# Altium PCB pcb.PcbDoc
Units mm, origin at the board's own origin, x right, y up, seen from the top; angles counter-clockwise.
Board outline 30 x 50 mm, 4 copper layers (Top Layer, GND, VCC, Bottom Layer), stack 0.651 mm thick; 32 components, 44 nets, 144 pads, 18 vias.
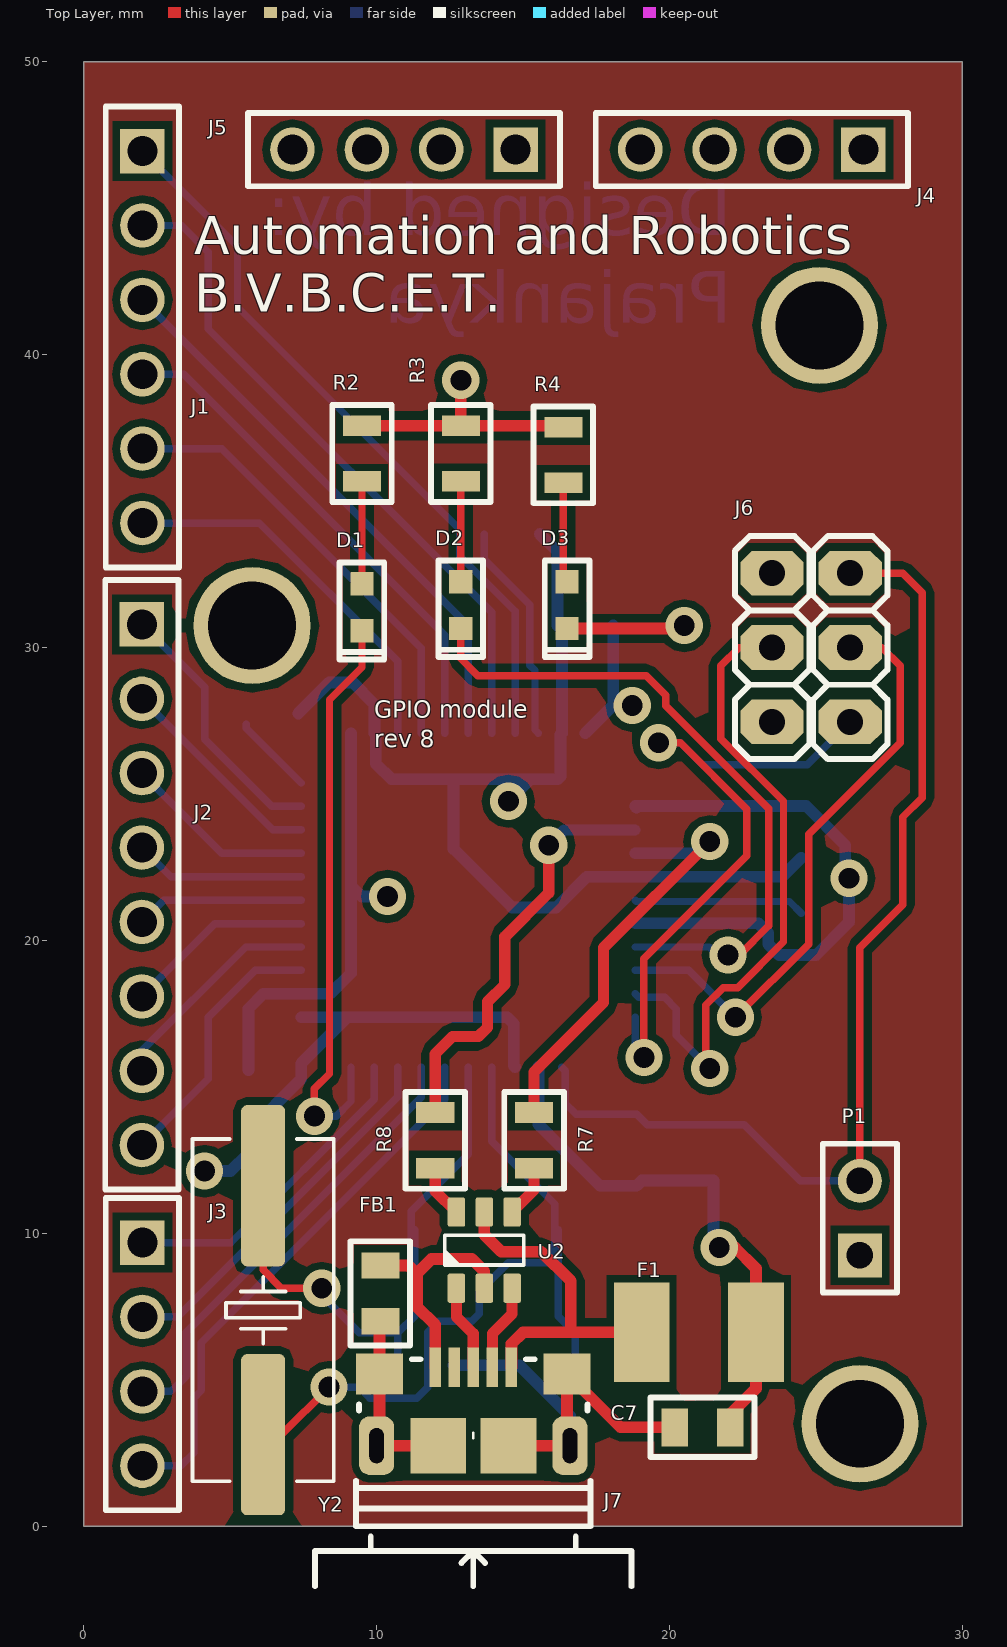
[diagram p0: Top Layer view]
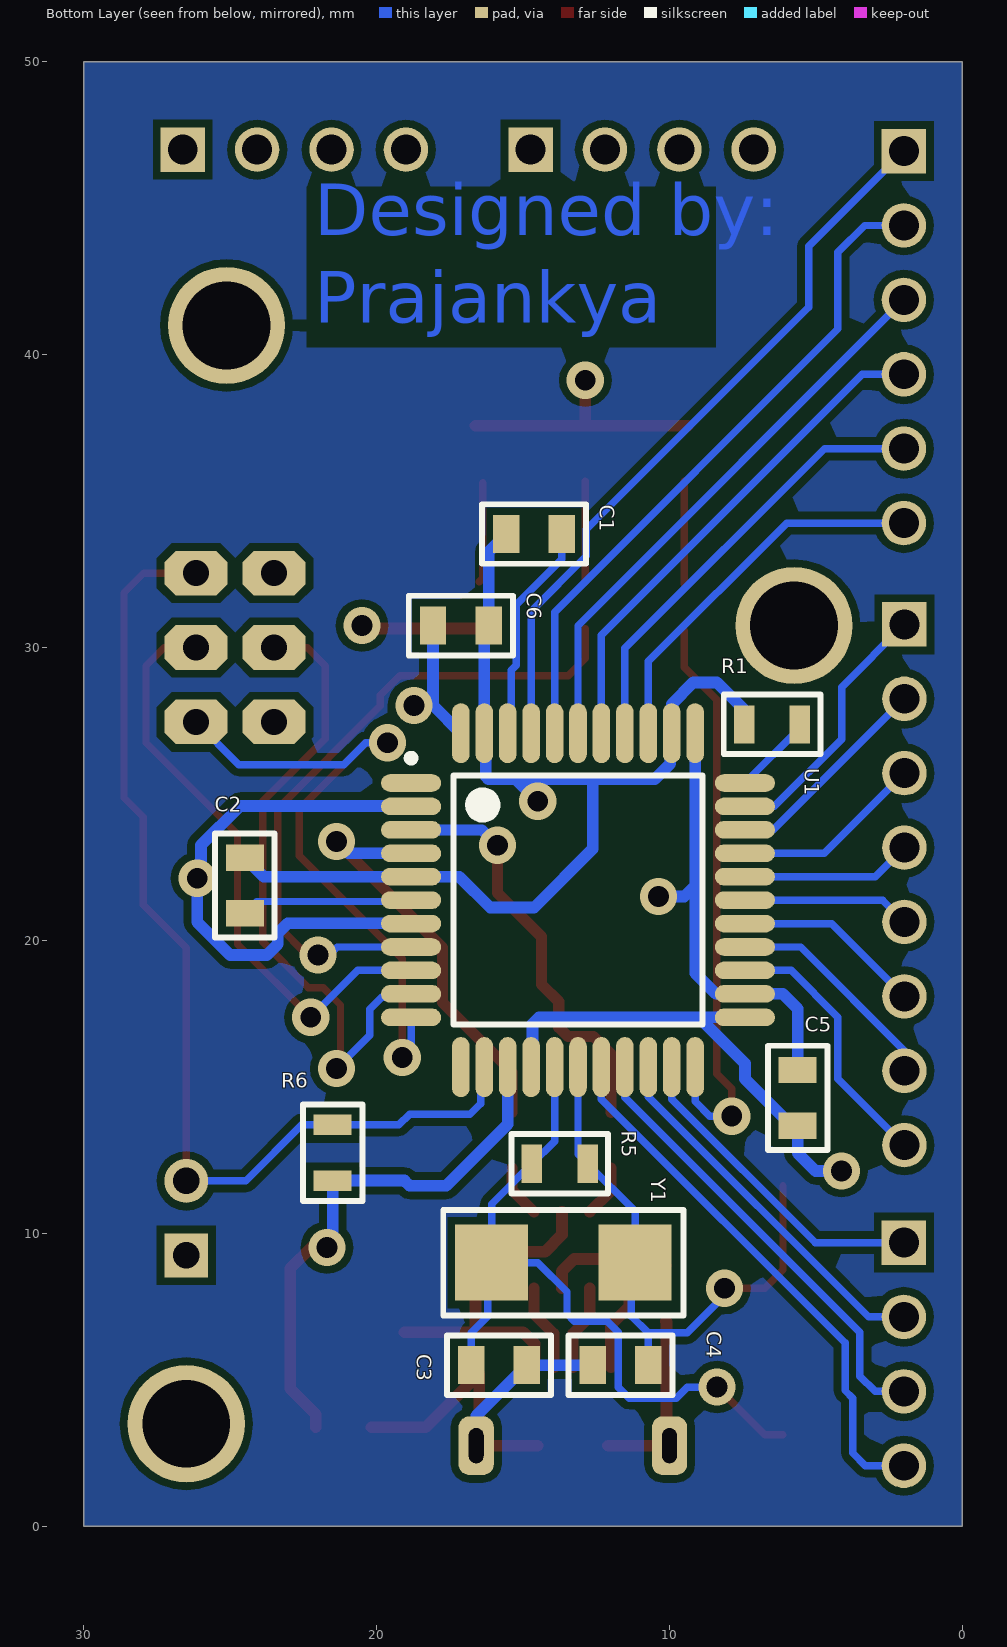
[diagram p1: Bottom Layer view, seen from below]
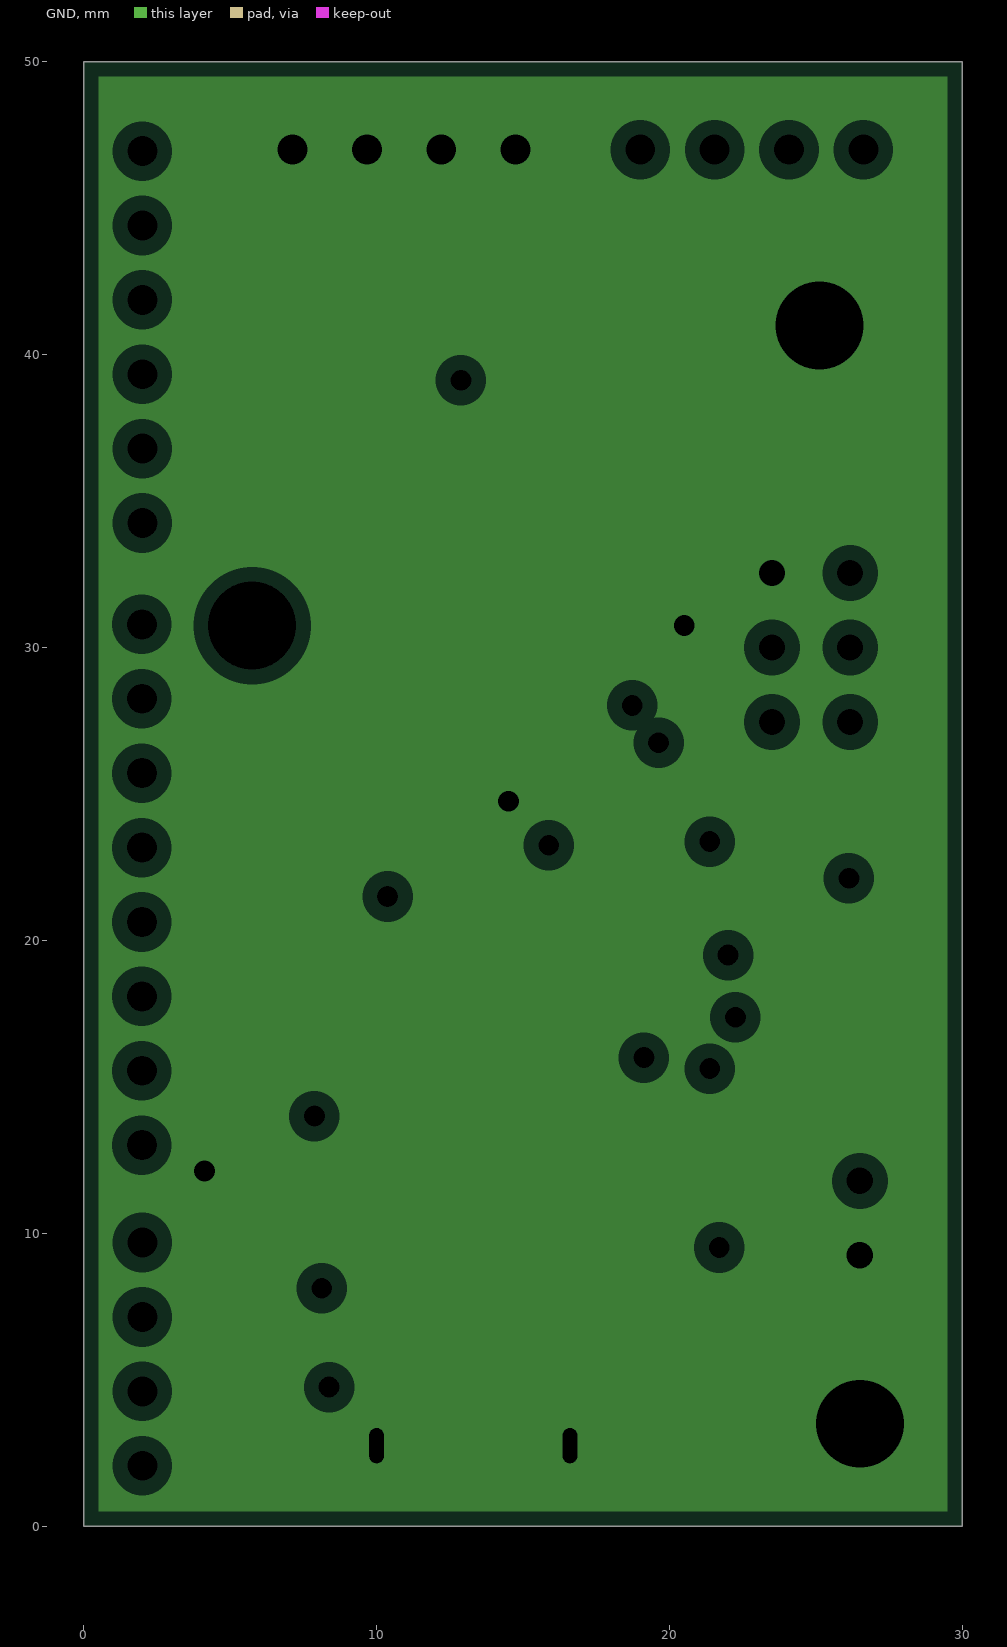
[diagram p2: GND, clearances drawn from the general rule]
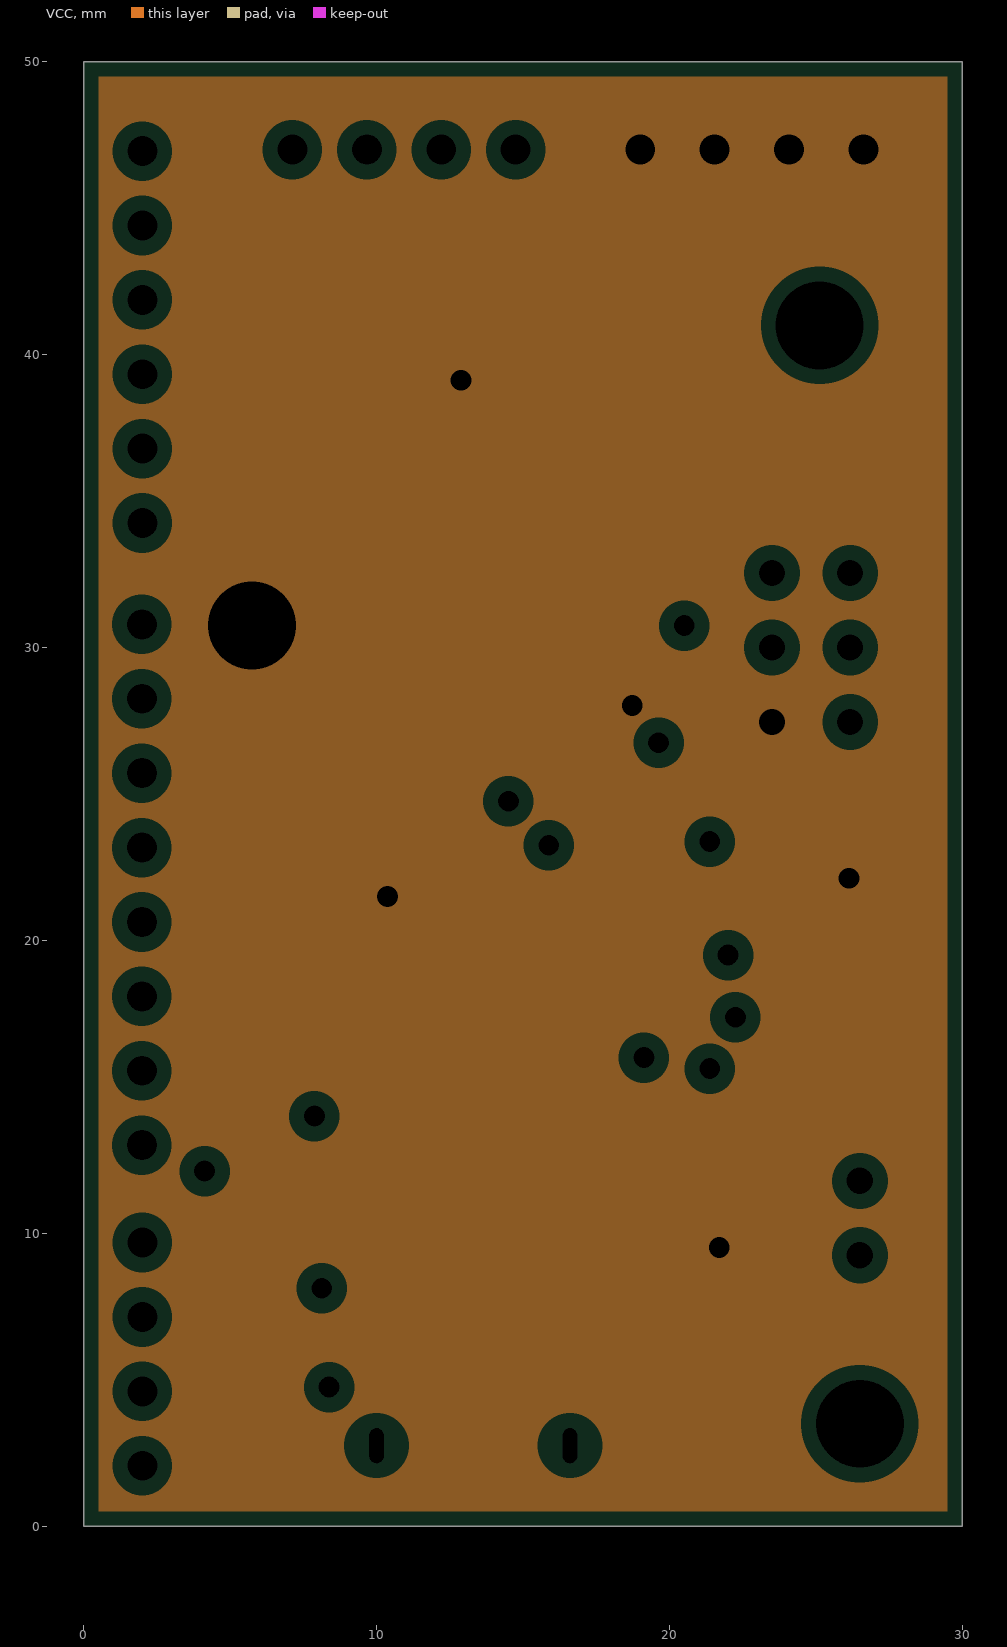
[diagram p3: VCC, clearances drawn from the general rule]

## Layer stack, top to bottom
Top Solder: solder mask 0.0102, Solder Resist, Dk 3.5
Top Layer: signal copper 0.0356
Dielectric 1: prepreg 0.127, FR-4, Dk 4.2
GND: plane copper 0.036, net GND
Dielectric 2: core 0.254, Dk 4.2
VCC: plane copper 0.036, net VCC
Dielectric 3: prepreg 0.127, Dk 4.2
Bottom Layer: signal copper 0.0356
Bottom Solder: solder mask 0.0102, Solder Resist, Dk 3.5

## Board outline
0,50 30,50 30,0 0,0

## Design rules (kind name [scope] priority, off if disabled: settings)
AssemblyTestPointUsage [(InNet('GND') OR InNet('VCC'))] p1:
AssemblyTestpoint [(InNet('GND') OR InNet('VCC'))] p1: testpointundercomponent=TRUE minsize=1.016 maxsize=5 preferedsize=1.524 minholesize=0 maxholesize=4 preferedholesize=0.813 testpointgrid=0.025 usegrid=FALSE gridtolerance=0 allowsidetop=TRUE allowsidebottom=TRUE
Clearance [All] p1: gap=0.254 except(0.15: Track-SMDPad SMDPad-SMDPad)
DiffPairsRouting DiffPair_DiffPairsRouting [(InDifferentialPairClass('All Differential Pairs'))] p1: maxlimit=150 minlimit=0.254 mostfreqgap=0.254 toplayer_minwidth=0.381 toplayer_maxwidth=0.381 toplayer_prefwidth=0.381 bottomlayer_minwidth=0.381 bottomlayer_maxwidth=0.381 bottomlayer_prefwidth=0.381 maxuncoupledlength=12.7
DiffPairsRouting [All] p2: maxlimit=0.254 minlimit=0.254 mostfreqgap=0.254 toplayer_minwidth=0.381 toplayer_maxwidth=0.381 toplayer_prefwidth=0.381 bottomlayer_minwidth=0.381 bottomlayer_maxwidth=0.381 bottomlayer_prefwidth=0.381 maxuncoupledlength=12.7
FabricationTestPointUsage [(InNet('GND') OR InNet('VCC'))] p1: valid=0 allowmultiple=FALSE
FabricationTestpoint [(InNet('GND') OR InNet('VCC'))] p1: side=3 testpointundercomponent=TRUE minsize=1.016 maxsize=5 preferedsize=1.524 minholesize=0 maxholesize=4 preferedholesize=0.813 testpointgrid=0.025 allowsidetop=TRUE allowsidebottom=TRUE usegrid=FALSE gridtolerance=0
HoleSize [All] p1: absolutevalues=TRUE maxlimit=5 minlimit=0.025 maxpercent=80.000 minpercent=20.000
MatchedLengths DiffPair_MatchedLengths [(InDifferentialPairClass('All Differential Pairs'))] p1: tolerance=0.1 checknetsindiffpair=TRUE checkdiffpairvsdiffpair=FALSE checkxsignals=FALSE checkothers=FALSE
MinimumSolderMaskSliver [All] p1: minsoldermaskwidth=0.095
PlaneClearance [All] p1: clearance=0.508
PlaneConnect [All] p1: planeconnectstyle=Relief reliefexpansion=0.508 reliefentries=4 reliefconductorwidth=0.254 reliefairgap=0.254
PolygonConnect [All] p1: connectstyle=Relief reliefconductorwidth=0.254 reliefentries=4 polygonreliefangle="90 Angle" airgapwidth=0.254
RoutingVias [All] p1: holewidth=0.711 width=1.27 viastyle="Through Hole" minholewidth=0.711 minwidth=1.27 maxholewidth=0.711 maxwidth=1.27
SilkToSolderMaskClearance [IsPad] p1: minsilkscreentomaskgap=0.089 clearancetoexposedcopper=TRUE
SolderMaskExpansion [All] p1: expansion=0.052
Width Power [InNetClass('power_class')] p1: maxlimit=0.5 minlimit=0.3 preferedwidth=0.4
Width [All] p2: maxlimit=0.254 minlimit=0.254 preferedwidth=0.254
20 further rules are at their usual default settings.

## Classes and differential pairs
net class power_class: GND NetF1_1 NetFB1_2 VCC
net class USB: D_N D_P U_IN_N U_IN_P
differential pair D: +D_P -D_N
differential pair U_IN: +U_IN_P -U_IN_N
differential pair USB_D: +USB_D_P -USB_D_N

## Components (designator, comment, footprint, x,y, rotation, side; value= is the part's Value field where it differs from the comment)
C1 "100nF" C0805 14.625,33.875 r0 bottom
C2 "1uF" C0805 24.5,21.875 r90 bottom
C3 "22pF" C0805 15.825,5.5 r0 bottom
C4 "22pF" C0805 11.675,5.5 r180 bottom
C5 "100nF" C0805 5.625,14.625 r270 bottom
C6 "100nF" C0805 17.125,30.75 r180 bottom
C7 "100nF" C0805 21.125,3.375 r180 top
D1 "Orange" LED_0603 9.5,31.375 r90 top
D2 "Orange" LED_0603 12.875,31.45 r90 top
D3 "GREEN" LED_0603 16.5,31.45 r90 top
F1 "Polyfuse 500mA" L1812 21,6.625 r0 top
FB1 "EMI Ferrite Chip Bead" C0805 10.125,7.95 r90 top
J1 "06p" 61300611821 2,40.6 r270 top
J2 "08p" 61300811821 1.983,21.9 r270 top
J3 "04p" 61300411821 2,5.875 r270 top
J4 "04p" 61300411821 22.81,47 r180 top
J5 "04p" 61300411821 10.935,47 r180 top
J6 "3x2" "Male 3x2" 26.167,27.46 r90 top
J7 "Micro USB" 10118193 13.3,2.75 r0 top
P1 "Header 2" HDR1X2 26.5,9.25 r90 top
R1 "10k" R0805 6.5,27.375 r0 bottom
R2 "1K" R0805 9.5,36.625 r270 top
R3 "1K" R0805 12.875,36.625 r270 top
R4 "1K" R0805 16.375,36.575 r270 top
R5 "1M" R0805 13.75,12.375 r0 bottom
R6 "10k" R0805 21.5,12.75 r270 bottom
R7 "22R" R0805 12,13.175 r90 top
R8 "22R" R0805 15.375,13.175 r90 top
U1 "ATmega32U4-AU" 44ML_M 13.125,21.375 r180 bottom
U2 "USBLC6-2" TSOT23-6 13.675,9.425 r90 top
Y1 "16MHz" ABM7_v1_1_BIG 13.625,9 r0 bottom
Y2 "16MHz" CRYSTAL_HC49-US-SM 6.125,7.375 r270 top

## Footprints (in the part's own frame and the unit in brackets; to place one, negate y for a bottom-side part, rotate by r counter-clockwise, add the part's x,y. Pads: shape width x height; smd on the part's side, far side on the other; paste and mask are expansions set on the pad)
44ML_M [mm] "Thin QFP, 44-Leads, Body 10x10mm, Pitch 0.8mm, IPC Low Density"
  oval 2.05x0.6 smd: 1(-5.7,4) 2(-5.7,3.2) 3(-5.7,2.4) 4(-5.7,1.6) 5(-5.7,0.8) 6(-5.7,0) 7(-5.7,-0.8) 8(-5.7,-1.6) 9(-5.7,-2.4) 10(-5.7,-3.2) 11(-5.7,-4) 23(5.7,-4) 24(5.7,-3.2) 25(5.7,-2.4) 26(5.7,-1.6) 27(5.7,-0.8) 28(5.7,0) 29(5.7,0.8) 30(5.7,1.6) 31(5.7,2.4) 32(5.7,3.2) 33(5.7,4)
  oval 0.6x2.05 smd: 12(-4,-5.7) 13(-3.2,-5.7) 14(-2.4,-5.7) 15(-1.6,-5.7) 16(-0.8,-5.7) 17(0,-5.7) 18(0.8,-5.7) 19(1.6,-5.7) 20(2.4,-5.7) 21(3.2,-5.7) 22(4,-5.7) 34(4,5.7) 35(3.2,5.7) 36(2.4,5.7) 37(1.6,5.7) 38(0.8,5.7) 39(0,5.7) 40(-0.8,5.7) 41(-1.6,5.7) 42(-2.4,5.7) 43(-3.2,5.7) 44(-4,5.7)
  silkscreen extent -5.82,-4.25 4.25,4.97, body extent -5,-5 5,5, height 1.2
10118193 [mm]
  rect 0.4x1.35 smd mask+0.05: 1(-1.3,2.675) 2(-0.65,2.675) 3(0,2.675) 4(0.65,2.675) 5(1.3,2.675)
  rect 1.6x1.4 smd: 6(-3.2,2.45) 7(3.2,2.45)
  rrect60% 1.2x2 hole 0.5 slot 1.2 at 90 deg: 8(-3.3,0) 9(3.3,0)
  rect 1.9x1.9 smd paste-10: 10(-1.2,0) 11(1.2,0)
  silkscreen extent -5.4,-4.8 5.4,2.95, body extent -3.93,-2.76 3.93,2.9, height 2.85
61300411821 [mm] "4 row, straight, gold plating"
  rect 1.52x1.52 hole 1.02: 1(-3.81,0)
  round 1.52 hole 1.02: 2(-1.27,0) 3(1.27,0) 4(3.81,0)
  silkscreen extent -5.33,-1.25 5.33,1.25, body extent -5.33,-1.25 5.33,1.25, height 8.51
61300611821 [mm] "6 row, straight, gold plating"
  rect 1.52x1.52 hole 1.02: 1(-6.35,0)
  round 1.52 hole 1.02: 2(-3.81,0) 3(-1.27,0) 4(1.27,0) 5(3.81,0) 6(6.35,0)
  silkscreen extent -7.87,-1.25 7.87,1.25, body extent -7.87,-1.25 7.87,1.25, height 8.51
61300811821 [mm] "8 row, straight, gold plating"
  rect 1.52x1.52 hole 1.02: 1(-8.89,0)
  round 1.52 hole 1.02: 2(-6.35,0) 3(-3.81,0) 4(-1.27,0) 5(1.27,0) 6(3.81,0) 7(6.35,0) 8(8.89,0)
  silkscreen extent -10.41,-1.25 10.41,1.25, body extent -10.41,-1.25 10.41,1.25, height 8.51
ABM7_v1_1_BIG [mm]
  rect 2.5x2.6 smd: 1(-2.45,0) 2(2.45,0)
  silkscreen extent -4.1,-1.8 4.1,1.8, body extent -3.1,-1.85 3.1,1.85, height 1.45
C0805 [mm]
  rect 0.9x1.3 smd: 1(-0.95,0) 2(0.95,0)
  silkscreen extent -1.78,-1.02 1.78,1.02, body extent -1,-0.6 1,0.6, height 1.5
CRYSTAL_HC49-US-SM [mm] "SMD Crystal HC49/US-SM package"
  round 0.508 on Mech15: 0(0,0)
  rrect25% 5.5x1.5 smd: 1(-4.25,0) 2(4.25,0)
  silkscreen extent -5.84,-2.41 5.84,2.41, body extent -6.4,-2.41 6.4,2.42, height 4.29
HDR1X2 [mm] "Connector; Header; 2 Position"
  rect 1.5x1.5 hole 0.9: 1(0,0)
  round 1.5 hole 0.9: 2(2.54,0)
  silkscreen extent -1.27,-1.27 3.81,1.27
L1812 [mm]
  rect 1.9x3.4 smd: 1(-1.95,0) 2(1.95,0)
  body extent -2.28,-1.62 2.28,1.62, height 0.7
LED_0603 [mm]
  rect 0.8x0.8 smd: 1(-0.8,0) 2(0.8,0)
  silkscreen extent -1.78,-0.76 1.52,0.76, body extent -0.85,-0.4 0.85,0.4, height 0.66
"Male 3x2" [mil]
  oct 60x85 hole 35: 1(0,0) 2(100,0) 3(200,0) 4(0,105) 5(100,105) 6(200,105)
  silkscreen extent -50,-50 250,155, body extent -50,-50 250,155, height 460
R0805 [mm]
  rect 0.7x1.3 smd: 1(-0.95,0) 2(0.95,0)
  silkscreen extent -1.65,-1.02 1.65,1.02, body extent -1,-0.6 1,0.6, height 0.7
TSOT23-6 [mm] "SOT-23-6 Thin, 6 lead"
  round 0.5 on Mech15: 0(0,0)
  rrect25% 1x0.6 smd: 1(-1.3,0.95) 2(-1.3,0) 3(-1.3,-0.95) 4(1.3,-0.95) 5(1.3,0) 6(1.3,0.95)
  silkscreen extent -0.51,-1.35 0.51,1.35, body extent -1.4,-1.45 1.4,1.45, height 1

## Part data
C1 C2: library part C2012X5R1C106M, "CAP CER 16V 20% X5R 0805"
C3 C4: library part C0805C180J5GACTU, "CAP CER 22pF 50V 5% NP0 0805"
C5 C6 C7: library part C2012X7R1H104K085AA, "CAP CER 0.1UF 50V 10% X7R 0805"
D1 D2 D3: library part "LO L29K-H2K1-24-Z", "LED SMARTLED ORANGE 606NM 0603"
F1: library part L-EUL1812
FB1: library part MPZ2012S601AT000, "Multilayer Ferrite Beads, Chip Beads in SMD 0805 package"
J1: library part 61300611821, "WR-PHD 2.54 mm Socket Header, 06p"
J2: library part 61300811821, "WR-PHD 2.54 mm Socket Header, 08p"
J3 J4 J5: library part 61300411821, "WR-PHD 2.54 mm Socket Header, 04p"
J6: "3x2 100mil Header"
J7: library part 10118193-0001LF, "CONN USB MICRO B RECPT SMT R/A"
P1: "Header, 2-Pin"
R1 R6: library part RC0805FR-0710KL, "RES SMD 10K OHM 1% 1/8W 0805"
R2 R3 R4: library part RC0805FR-071KL, "RES SMD 1K OHM 1% 1/8W 0805"
R5: library part RC0805FR-071ML, "RES SMD 1M OHM 1% 1/8W 0805"
R7 R8: library part RC0805FR-0722RL, "RES SMD 22 OHM 1% 1/8W 0805"
U1: "8-bit AVR Microcontroller, 2.7-5.5V, 32KB Flash, 2.5KB EEPROM, 1KB SRAM, USB Controller, 44-pin TQFP, Industrial Grade (-40°C to 85°C)"
Y1: library part ABM7-16.000MHZ-D2Y-T, "CRYSTAL 16MHZ 18PF SMD"
Y2: library part Crystal_6MHz_HC49/US, "Resonator Ceramic 6.00 MHz 30ppm"

## Free pads (board coordinates)
  round 4 hole 3: TP1(26.5,3.5) TP2(5.75,30.75) TP3(25.125,41)

## Via types
v1: diameter 1.27, hole 0.711, Top Layer to Bottom Layer, 18 vias

## Nets (pads, with @x,y where several pads share a name; then routed paths per layer and width w, separated by ;. In a path a pad name is that pad's centre, name@x,y a point inside that pad or via, vN(x,y) a via of type N, cw(c..) or ccw(c..) an arc to the next point about the centre after c; other vN are vias at no path point)
A0: J1.6 U1.36 | length 13.1
  Bottom Layer w0.254: J1.6 6,34.25 10.725,29.525 U1.36
A1: J1.5 U1.37 | length 15.2
  Bottom Layer w0.254: J1.5 4.71,36.79 11.525,29.975 U1.37
A2: J1.4 U1.38 | length 17.4
  Bottom Layer w0.254: J1.4 3.42,39.33 12.325,30.425 U1.38
A3: J1.3 U1.39 | length 19.4
  Bottom Layer w0.254: J1.3 13.125,30.745 U1.39
A4: J1.2 U1.40 | length 23.1
  Bottom Layer w0.254: J1.2 3.34,44.41 4.25,43.5 4.25,40.875 13.925,31.2 U1.40
A5: J1.1 U1.41 | length 25.1
  Bottom Layer w0.254: J1.1 5.25,43.7 5.25,41.625 12.844,34.031 12.844,33.124 14.725,31.243 U1.41
D0/RX: J3.2 U1.20 | length 12.9
  Bottom Layer w0.254: J3.2 3.207,7.145 10.725,14.663 U1.20
D1/TX: J3.1 U1.21 | length 11
  Bottom Layer w0.254: J3.1 5.028,9.685 9.925,14.582 U1.21
D2/SDA: J3.3 U1.19 | length 15.6
  Bottom Layer w0.254: J3.3 2.98,4.605 3.5,5.125 3.5,6.625 11.525,14.65 U1.19
D3/SCL: J3.4 U1.18 | length 18.7
  Bottom Layer w0.254: J3.4 3.315,2.065 3.75,2.5 3.75,4.375 4.008,4.633 4.008,6.258 12.325,14.575 U1.18
D7: U1.1
D11: U1.12
D_N: R7.2 U1.3 | length 14.4
  Top Layer w0.381: R7.2 12,16.125 12.594,16.719 13.469,16.719 13.781,17.031 13.781,17.906 14.375,18.5 14.375,20.125 15.875,21.625 v1(15.875,23.25)
  Bottom Layer w0.381: v1(15.875,23.25) 16.4,23.775 U1.3
D_P: R8.2 U1.4 | length 14.5
  Top Layer w0.381: R8.2 15.375,15.5 17.75,17.875 17.75,19.75 v1(21.375,23.375)
  Bottom Layer w0.381: U1.4 20.975,22.975 v1(21.375,23.375)
GND: C1.2 C2.2 C3.1 C4.1 C5.2 C6.2 C7.2 D3.1 FB1.1 J5.1 J5.2 J5.3 J5.4 J6.6 J7.6 J7.7 J7.8 J7.9 J7.10 J7.11 P1.1 pad.TP1 pad.TP3 R1.2 U1.5 U1.15 U1.23 U1.35 U1.43 | length 79.4
  Top Layer w0.4: FB1.1 10.1,6.975 J7.6 10.1,2.85 J7.8 J7.10 ; J7.11 J7.9 16.5,2.85 J7.7 18.325,3.375 C7.2 ; D3.1 20.4,30.65 v1(20.5,30.75)
  Bottom Layer w0.4: v1(4.125,12.125) 5.009,12.125 5.625,12.741 C5.2@5.625,13.475 ; C5.2 C5.2@5.625,13.475 ; R1.2@7.325,27.75 8.383,28.808 9.183,28.808 9.925,28.066 U1.35 9.971,27.029 9.971,26.038 10.509,25.5 12.625,25.5 ; U1.23 9,17.375 ; C4.1 C3.1 16.6,3.775 J7.9 ; v1(14.5,24.75) 15.25,25.5 ; U1.15 14.679,15.721 14.679,17.153 14.457,17.375 9,17.375 ; C1.2 16.175,33.275 C6.2 16.325,30.6 U1.43 16.279,27.029 16.279,25.597 16.182,25.5 15.25,25.5 ; C2.2 23.85,22.175 U1.5 17.175,22.175 16.125,21.125 14.625,21.125 12.625,23.125 12.625,25.5 ; C5.2@5.625,13.475 7.425,15.275 7.425,15.8 9,17.375 ; 12.625,25.5 15.25,25.5
IO0: J2.8 U1.25 | length 9.1
  Bottom Layer w0.254: J2.8 4.25,15.277 4.25,17.375 5.85,18.975 U1.25
IO1: J2.7 U1.26 | length 7.6
  Bottom Layer w0.254: J2.7 1.983,16.233 5.525,19.775 U1.26
IO2: J2.6 U1.27 | length 6.5
  Bottom Layer w0.254: J2.6 4.468,20.575 U1.27
IO3: J2.5 U1.28 | length 5.8
  Bottom Layer w0.254: J2.5 2.728,21.375 U1.28
IO4: J2.4 U1.29 | length 5.9
  Bottom Layer w0.254: J2.4 2.978,22.175 U1.29
IO5: J2.3 U1.30 | length 6.6
  Bottom Layer w0.254: J2.3 4.718,22.975 U1.30
IO6: J2.2 U1.31 | length 7.3
  Bottom Layer w0.254: J2.2 6.458,23.775 U1.31
IO7: J2.1 U1.32 | length 9.1
  Bottom Layer w0.254: J2.1 4.125,28.648 4.125,26.875 6.425,24.575 U1.32
MISO: J6.1 U1.11 | length 23.2
  Top Layer w0.254: v1(19.125,16) 19.125,19.375 22.641,22.891 22.641,24.484 20.375,26.75 v1(19.625,26.75) v1@20.001,26.75
  Bottom Layer w0.254: U1.11 18.825,16.3 v1(19.125,16) ; v1(19.625,26.75) 20.375,26.75 21.125,26 24.707,26 J6.1
MOSI: J6.5 U1.10 | length 22.2
  Top Layer w0.254: v1(21.375,15.625) 21.234,15.766 21.234,17.796 21.829,18.391 22.328,18.391 23.891,19.954 23.891,24.75 21.75,26.891 21.75,29.375 22.375,30 J6.5
  Bottom Layer w0.254: U1.10 18.944,18.056 19.832,18.056 20.231,17.657 20.231,16.769 v1(21.375,15.625)
NetC1_1: C1.1 U1.42 | length 7.6
  Bottom Layer w0.254: C1.1 13.675,33.012 15.233,31.454 15.233,29.392 15.406,29.219 15.406,27.194 U1.42
NetC2_1: C2.1 U1.6 | length 5.9
  Bottom Layer w0.254: U1.6 18.87,21.33 24.095,21.33 C2.1
NetD1_2: D1.2 R2.2 | length 3.5
  Top Layer w0.254: D1.2 R2.2
NetD2_2: D2.2 R3.2 | length 3.4
  Top Layer w0.254: D2.2 R3.2
NetD3_2: D3.2 R4.2 | length 3.4
  Top Layer w0.254: R4.2 16.375,32.375 D3.2
NetF1_1: F1.1 J7.5 U2.5 | length 11.5
  Top Layer w0.4: U2.5 13.675,9.95 14.25,9.375 15.625,9.375 16.625,8.375 16.625,6.625 ; J7.5@14.604,5.425 14.604,6.229 15,6.625 16.625,6.625 ; F1.1 16.625,6.625
NetFB1_2: FB1.2 J7.1 U2.2 | length 8.1
  Top Layer w0.4: FB1.2 11.1,8.9 11.375,8.625 ; J7.1 12,6.875 11.375,7.5 11.375,8.625 ; U2.2 13.675,8.7 13.25,9.125 11.875,9.125 11.375,8.625
NetR1_1: R1.1 U1.33 | length 2.8
  Bottom Layer w0.254: R1.1 5.55,27.25 U1.33
RESET: J6.3 P1.2 R6.1 U1.13 | length 37.1
  Top Layer w0.254: J6.3 27.96,32.54 28.625,31.875 28.625,24.875 27.963,24.213 27.963,21.213 26.5,19.75 P1.2
  Bottom Layer w0.254: U1.13 16.444,15.556 16.444,14.431 16.812,14.063 18.875,14.063 19.238,13.7 R6.1 ; 22.45,13.7 R6.1 ; P1.2 24.46,11.79 22.55,13.7 R6.1
RX_LED: D2.1 U1.8 | length 23
  Top Layer w0.254: D2.1 12.875,29.625 13.459,29.041 19.209,29.041 19.875,28.375 19.875,28.008 23.383,24.5 23.383,20.508 22.375,19.5 v1(22,19.5)
  Bottom Layer w0.254: U1.8 21.35,19.775 21.625,19.5 v1(22,19.5)
SCK: J6.2 U1.9 | length 20.4
  Top Layer w0.254: v1(22.25,17.375) 24.75,19.875 24.75,23.625 27.875,26.75 27.875,29.375 27.25,30 J6.2
  Bottom Layer w0.254: U1.9 20.65,18.975 v1(22.25,17.375)
TX_LED: D1.1 U1.22 | length 19.9
  Top Layer w0.254: v1(7.875,14) 7.875,14.938 8.391,15.454 8.391,28.216 9.5,29.325 D1.1
  Bottom Layer w0.254: v1(7.875,14) 8.625,14 9.125,14.5 U1.22
U_IN_N: R7.1 U2.6 | length 1.8
  Top Layer w0.381: R7.1 12,11.45 U2.6
U_IN_P: R8.1 U2.4 | length 1.8
  Top Layer w0.381: U2.4 15.375,11.475 R8.1
USB_D_N: J7.4 U2.3 | length 3
  Top Layer w0.381: J7.4 13.95,6.106 13.956,6.112 13.956,6.581 14.625,7.25 U2.3
USB_D_P: J7.3 U2.1 | length 2.9
  Top Layer w0.381: U2.1 12.725,7.15 13.305,6.57 13.3,6.564 J7.3
VCC: C5.1 C6.1 C7.1 F1.2 J4.1 J4.2 J4.3 J4.4 J6.4 pad.TP2 R2.1 R3.1 R4.1 R6.2 U1.2 U1.7 U1.14 U1.24 U1.34 U1.44 | length 66.7
  Top Layer w0.4: R2.1@9.375,37.575 R3.1 ; v1(12.875,39.125) R3.1 ; R4.1@16.625,37.575 R3.1 ; v1(21.697,9.515) 22.235,9.515 22.95,8.8 F1.2 22.95,4.7 22.075,3.825 C7.1
  Bottom Layer w0.4: C5.1 5.625,17.665 6.135,18.175 U1.24 8.416,18.175 9.125,18.884 9.125,21.875 ; U1.34 9.125,21.875 ; v1(10.375,21.5) 9.5,21.5 9.125,21.875 ; U1.14 15.525,13.725 17.625,11.625 18.875,11.625 19.05,11.8 R6.2 21.5,9.712 v1(21.697,9.515) ; U1.44 18.075,28.025 ; C6.1 18.075,28.025 ; v1(18.725,28.025) 18.075,28.025 ; U1.7@18.839,20.589 23.036,20.589 23.375,20.25 23.375,19.875 23.75,19.5 25,19.5 26.125,20.625 v1(26.125,22.125) 26,22.251 26,23.25 24.661,24.589 18.839,24.589 U1.2 U1.2@18.871,24.529
XTAL1: C4.2 R5.1 U1.17 Y1.1 Y2.1 | length 21
  Top Layer w0.254: Y2.1 6.125,8.75 6.75,8.125 v1(8.125,8.125)
  Bottom Layer w0.254: v1(8.125,8.125) 8,8 9.4,6.6 10.725,6.6 ; C4.2 10.725,6.6 ; Y1.1 11.175,10.75 R5.1 13.125,12.7 U1.17 ; Y1.1@11.3,10.125 11.3,7.175 10.725,6.6
XTAL2: C3.2 R5.2 U1.16 Y1.2 Y2.2 | length 26.7
  Top Layer w0.254: Y2.2 6.75,3.125 v1(8.375,4.75)
  Bottom Layer w0.254: v1(8.375,4.75) 9.397,4.75 9.772,4.375 11.375,4.375 11.75,4.75 11.75,6.625 12.125,7 13.25,7 13.5,7.25 13.5,8 14.5,9 Y1.2 16.075,11 R5.2 13.925,13.15 U1.16 ; Y1.2@16.2,10.125 16.2,7.175 16.775,6.6 C3.2
pads on no net: J7.2 U2.0 Y2.0

## Polygon pours and split planes (outlines as drawn)
no net on Top Layer "Top Layer-No Net" (solid, pour order 0): 0,50 30,50 30,0 0,0
no net on Bottom Layer "Bottom Layer-No Net" (solid, pour order 2): 0,50 0,0 30,0 30,50
GND on GND (split plane): 29.49,49.49 29.49,0.51 0.51,0.51 0.51,49.49
VCC on VCC (split plane): 29.49,49.49 29.49,0.51 0.51,0.51 0.51,49.49

## Other copper
Bottom Layer:
  text "Designed by: / Prajankya" at 22.125,40.5 h3

## Silkscreen, mask and mechanical layers (free items; w line width, h text height)
Top Overlay:
  text "Automation and Robotics / B.V.B.C.E.T." at 3.771,41.472 h1.3
  text "GPIO module / rev 8" at 9.925,26.393 h1
Bottom Solder:
  text "Designed by: / Prajankya" at 22.439,40.371 h3

## Panel: embedded boards
"pcb.PcbDoc" at 164.75,34.5, 1 rows x 1 columns, spacing 0 x 0, rotation 0